# EAGLE board 5V AC-DC Regulator (EAGLE 9.6.2)
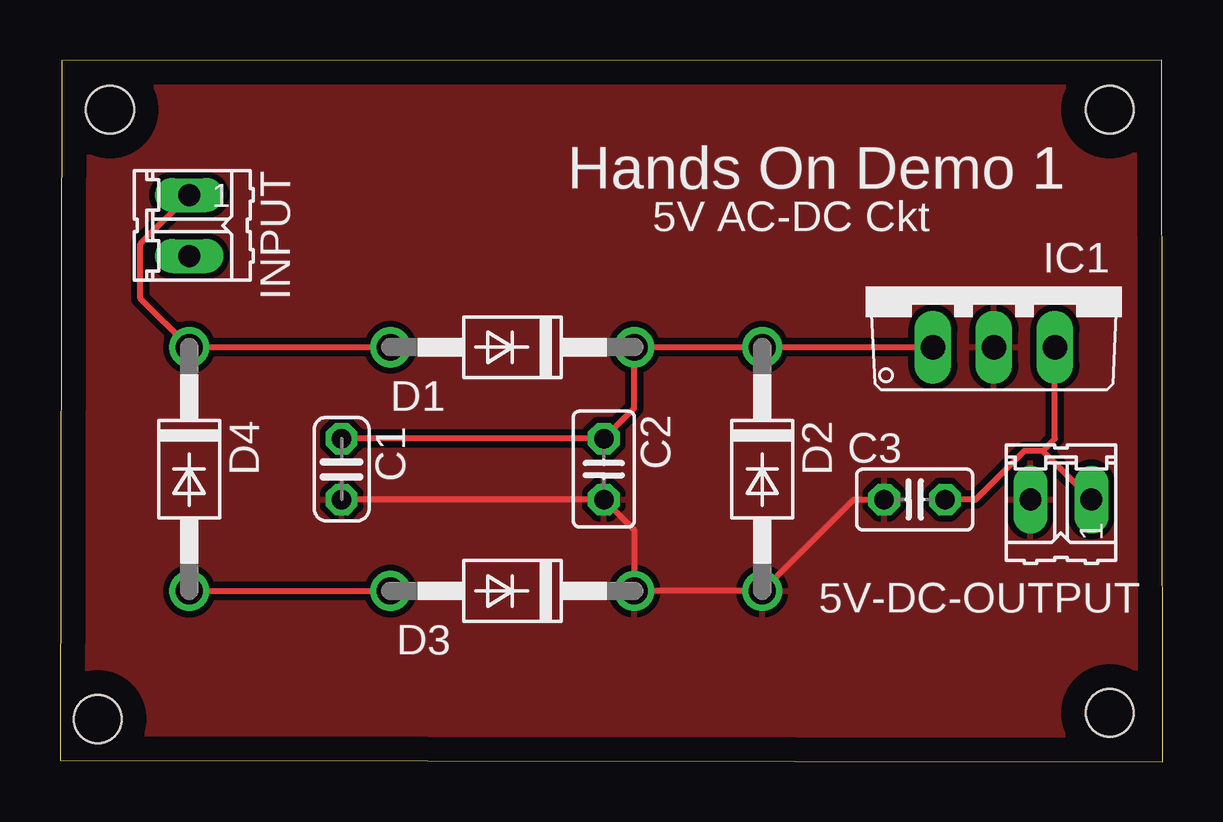
[diagram p0: board, top side]
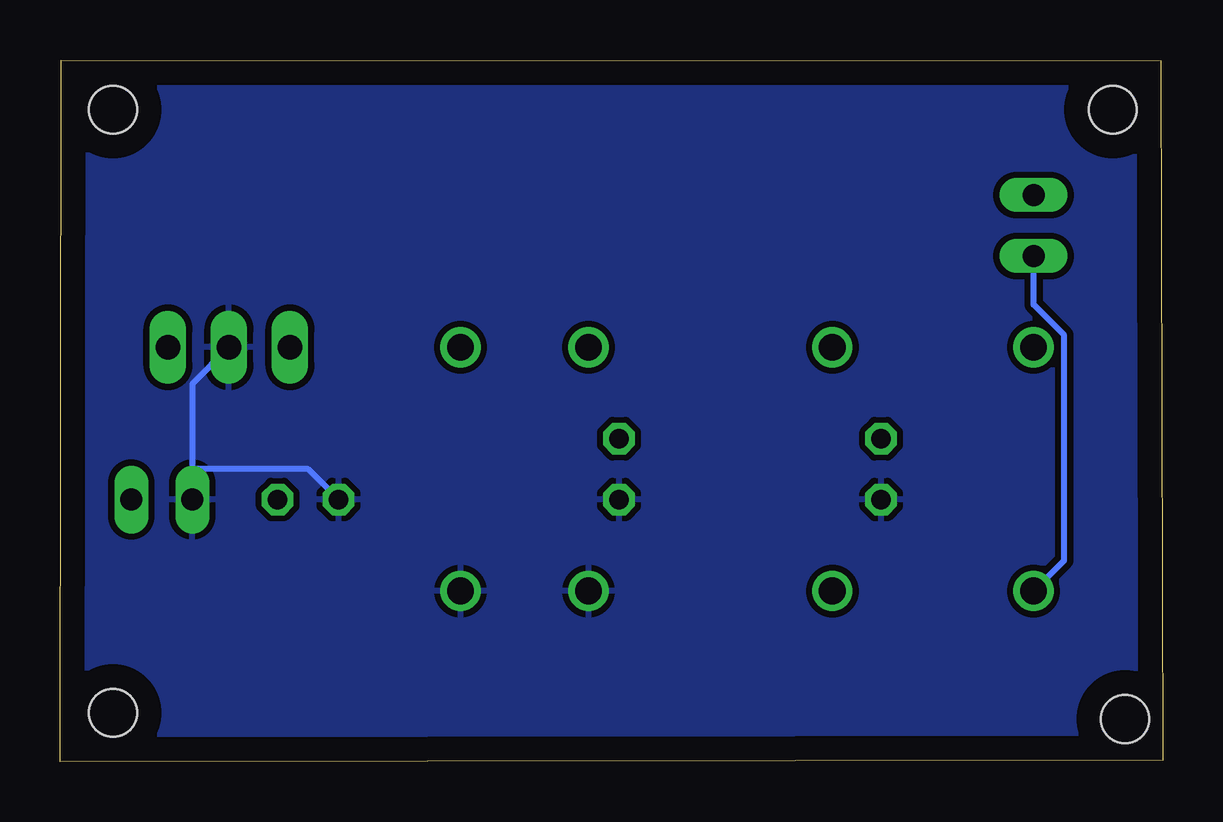
[diagram p1: board, bottom side, seen from below]

Size 45.95 x 29.25 mm. Coordinates in mm from the lower left corner, seen from the top.
Outline: 0,0.05 45.95,0 45.9,29.25 0.08,29.23 0,0.05
Copper layers (1*16): Top 0.035mm / dielectric 1.5mm / Bottom 0.035mm
Design rules "default *": minimum track width 10mil, minimum drill 0.35mm, track to track 10mil, track to pad 10mil, pad to pad 10mil, via to via 10mil, smd to smd 10mil, copper to edge 40mil, drill to drill 10mil, minimum pad ring 10mil, minimum via ring 8mil, stop-mask expansion 4mil, vias tented up to drill 0mil, thermal gap 10mil
Holes 2 mm at 2.08,27.18 43.74,27.18 43.74,2.03 1.57,1.78

## Footprints (pad centres in the part's own frame; a part is rotated, then mirrored left to right if it is on the bottom)
02P = drill 0.914 long: 1 -1.27,0; 2 1.27,0
C025-024X044 = drill 0.813 octagon: 1 -1.27,0; 2 1.27,0
C025-025X050 = drill 0.813 octagon: 1 -1.27,0; 2 1.27,0
DO41-10 = drill 1.118: A 5.08,0; C -5.08,0
TO220V = drill 1.016 long: 1 -2.54,-2.54; 2 0,-2.54; 3 2.54,-2.54

## Placement (x,y rotation side)
5V-DC-OUTPUT  [02P]  41.71,10.92 180 top
C1  1000uF  [C025-024X044]  11.73,12.19 270 top
C2  0.1uF  [C025-025X050]  22.66,12.19 270 top
C3  0.1 uF  [C025-025X050]  35.61,10.92 180 top
D1  1N4007  [DO41-10]  18.85,17.27 180 top
D2  1N4007  [DO41-10]  29.26,12.19 270 top
D3  1N4007  [DO41-10]  18.85,7.11 180 top
D4  1N4007  [DO41-10]  5.38,12.19 270 top
IC1  LM7805  [TO220V]  38.91,19.81 0 top
INPUT  [02P]  5.38,22.35 270 top

## Library data of the parts
5V-DC-OUTPUT INPUT = con-amp-quick; OC_FARNELL: unknown; OC_NEWARK: unknown
C1-C3 = rcl; SPICEPREFIX: C
D1-D4 = diode
IC1 = linear

## Nets
GND: 5V-DC-OUTPUT.2 C1.2 C2.2 C3.2 D2.A D3.C IC1.2
N$1: D1.A D4.C INPUT.1
N$2: C1.1 C2.1 D1.C D2.C IC1.1
N$3: D3.A D4.A INPUT.2
N$5: 5V-DC-OUTPUT.1 C3.1 IC1.3

## Tracks (layer width: path | path; a pad name or v marks a point on that pad's centre or on a via)
GND
  Top 0.254: C1.2 C2.2 23.93,9.65 D3.C D2.A 33.07,10.92 C3.2
  Bottom 0.254: 40.44,12.19 40.44,15.75 IC1.2 | 40.44,12.19 35.61,12.19 C3.2 | 40.44,12.19 5V-DC-OUTPUT.2
  pour Top: -0.53,29.59 46.41,29.59 46.41,-0.43 -0.53,-0.43 -0.53,-0.3
  pour Bottom: -1.22,30.23 47.04,30.23 47.04,-1.02 -1.22,-1.02 -1.22,29.97
N$1
  Top 0.254: INPUT.1 3.35,21.59 3.35,19.3 D4.C D1.A
N$2
  Top 0.254: IC1.1 D2.C D1.C 23.93,14.73 C2.1 C1.1
N$3
  Top 0.254: D4.A D3.A
  Bottom 0.254: INPUT.2 5.38,19.05 4.11,17.78 4.11,8.38 D4.A
N$5
  Top 0.254: C3.1 38.15,10.92 40.18,12.95 40.94,12.95 | 5V-DC-OUTPUT.1 40.94,12.95 | IC1.3 41.45,13.46 40.94,12.95

## Text on the board
tPlace: Hands On Demo 1 | 5V AC-DC Ckt